# EAGLE board untitled (EAGLE 7.6.0)

Size 100 x 100 mm. Coordinates in mm from the lower left corner, seen from the top.
Outline: 0,0 100,0 100,100 0,100 0,0
Copper layers (1*16): Top 0.035mm / dielectric 1.5mm / Bottom 0.035mm
Design rules "default *": minimum track width 10mil, minimum drill 24mil, track to track 15mil, track to pad 15mil, pad to pad 15mil, via to via 10mil, smd to smd 10mil, copper to edge 40mil, drill to drill 8mil, minimum pad ring 10mil, minimum via ring 8mil, stop-mask expansion 4mil, vias tented up to drill 0mil, thermal gap 10mil

## Footprints (pad centres in the part's own frame; a part is rotated, then mirrored left to right if it is on the bottom)
ANT_315 = drill 1.016 pad 1.88: 1 -4.68,0.03
BUZZ_MODULE = drill 1.016 pad 1.88: 1 3.52,-1.97; 3 6.06,-1.97; 5 8.6,-1.97
E5-5 = drill 0.813 pad 1.905: + -2.54,0 | drill 0.813 pad 1.905 octagon: - 2.54,0
SO16 = smd 0.66 x 2.032: 1 -4.445,-3.073; 2 -3.175,-3.073; 3 -1.905,-3.073; 4 -0.635,-3.073; 5 0.635,-3.073; 6 1.905,-3.073; 7 3.175,-3.073; 8 4.445,-3.073; 9 4.445,3.073; 10 3.175,3.073; 11 1.905,3.073; 12 0.635,3.073; 13 -0.635,3.073; 14 -1.905,3.073; 15 -3.175,3.073; 16 -4.445,3.073
OUT_HEAD_4_AC_2CH = drill 1.6 pad 2.54: 1 -7.14,0.22; 2 -2.06,0.22; 3 3.02,0.22; 4 8.1,0.22
USB_V_OUT = drill 1.016 pad 1.88: 1 2.92,1.53; 4 10.04,1.53 | drill 1.016 pad 1.676: 2 5.46,1.53; 3 7.5,1.53 | drill 2 pad 2.184 long: P$1 -0.05,0.17; P$2 13.02,0.27
G5LE = drill 1.321 long: 1 -7.493,-5.969; 2 -7.493,5.969; O 4.699,5.969; P -9.525,0; S 4.699,-5.969
LIGHT_DEC = drill 1.016 pad 1.88: 1 -3.68,2.03; 2 -1.14,2.03; 3 1.4,2.03; 4 3.94,2.03
SELECT_3 = drill 1.016 pad 1.88: 1 -3.98,2.03; 2 -1.44,2.03; 3 1.1,2.03
ARDUINO_NANO = drill 1.016 pad 1.88: 1 -10.2,-8.1; 2 -7.66,-8.1; 3 -5.12,-8.1; 4 -2.58,-8.1; 5 -0.04,-8.1; 6 2.5,-8.1; 7 5.04,-8.1; 8 7.58,-8.1; 9 10.12,-8.1; 10 12.66,-8.1; 11 15.2,-8.1; 12 17.74,-8.1; 13 20.28,-8.1; 14 22.82,-8.1; 15 25.36,-8.1; 16 -10.2,6.93; 17 -7.66,6.93; 18 -5.12,6.93; 19 -2.58,6.93; 20 -0.04,6.93; 21 2.5,6.93; 22 5.04,6.93; 23 7.58,6.93; 24 10.12,6.93; 25 12.66,6.93; 26 15.2,6.93; 27 17.74,6.93; 28 20.28,6.93; 29 22.82,6.93; 30 25.36,6.93
NRF24L01 = drill 1.016 pad 1.88: 1 -13.21,1.73; 2 -13.21,4.27; 3 -10.67,1.73; 4 -10.67,4.27; 5 -8.13,1.73; 6 -8.13,4.27; 7 -5.59,1.73; 8 -5.59,4.27
IIC_OLED = drill 1.016 pad 1.88: 1 -3.68,2.03; 2 -1.14,2.03; 3 1.4,2.03; 4 3.94,2.03
315MHZ_RX_SMT = drill 1.016 pad 1.88: 1 -6.68,-6.86; 2 -4.14,-6.86; 3 -1.6,-6.86; 4 0.94,-6.86; 5 3.48,-6.86; 6 6.02,-6.86
IIC_TEMPERATURE = drill 1.016 pad 1.88: 1 -3.68,2.03; 2 -1.14,2.03; 3 1.4,2.03; 4 3.94,2.03
MOS_IRF520 = drill 1.016 pad 1.88: 1 -3.68,2.03; 2 -1.14,2.03; 3 1.4,2.03
ESP8266_MINI = drill 1.016 pad 1.88: 1 -10.61,1.53; 2 -8.07,1.53; 3 -5.53,1.53; 4 -2.99,1.53; 5 -0.45,1.53; 6 2.09,1.53; 7 4.63,1.53; 8 7.17,1.53; 9 -10.61,24.23; 10 -8.07,24.23; 11 -5.53,24.23; 12 -2.99,24.23; 13 -0.45,24.23; 14 2.09,24.23; 15 4.63,24.23; 16 7.17,24.23

## Placement (x,y rotation side)
ANT  [ANT_315]  101.3,74 0 top
BUZZ  [BUZZ_MODULE]  94.2,78 90 top
C1  [E5-5]  47.28,87.9 90 top
IC2  ULN2003AD  [SO16]  18.7,44.7 180 bottom
J  [OUT_HEAD_4_AC_2CH]  14,6 180 top
K1  [USB_V_OUT]  66.2,77.5 180 top
K2  G5L  [G5LE]  62.9,26.6 270 top
K3  G5L  [G5LE]  45.7,26.6 270 top
K4  G5L  [G5LE]  28.5,26.6 270 top
K5  G5L  [G5LE]  11.3,26.6 270 top
LIGHT  [LIGHT_DEC]  61.5,94.98 0 top
LOCAL  [SELECT_3]  87.22,94.92 0 top
NANO  [ARDUINO_NANO]  15.6,60.4 0 top
NRF  [NRF24L01]  92.9,34 270 top
OLED  [IIC_OLED]  74.24,94.96 0 top
RF_RX  [315MHZ_RX_SMT]  102.3,59.3 270 top
TEMPERATURE  [IIC_TEMPERATURE]  94.78,99 180 top
USB_CHARGE_MOS  [MOS_IRF520]  41.44,74.96 270 top
WIFI_CPU  [ESP8266_MINI]  19.6,72.7 0 top

## Library data of the parts
ANT BUZZ J K1 LIGHT LOCAL NANO NRF OLED RF_RX TEMPERATURE USB_CHARGE_MOS WIFI_CPU = rx
C1 = resistor
IC2 = uln-udn
K2-K5 = relay; OC_FARNELL: unknown; OC_NEWARK: unknown

## Nets
3V3: WIFI_CPU.9
+5V: BUZZ.5 C1.+ IC2.9 K1.1 K2.1 K3.1 K4.1 K5.1 LIGHT.4 NANO.12 OLED.2 RF_RX.3 TEMPERATURE.1 WIFI_CPU.1
A0: LIGHT.1 WIFI_CPU.15
ANT: ANT.1 RF_RX.1
D0: WIFI_CPU.14
D1: OLED.3 TEMPERATURE.4 WIFI_CPU.6
D2: OLED.4 TEMPERATURE.2 WIFI_CPU.5
D3: WIFI_CPU.4
D4: USB_CHARGE_MOS.1 WIFI_CPU.3
D5: LOCAL.1 WIFI_CPU.13
D6: LOCAL.3 RF_RX.4 WIFI_CPU.12
D7: WIFI_CPU.11
D8: BUZZ.3 WIFI_CPU.10
GND: BUZZ.1 C1.- IC2.8 LIGHT.3 LOCAL.2 NANO.14 NRF.1 OLED.1 RF_RX.2 TEMPERATURE.3 USB_CHARGE_MOS.3 WIFI_CPU.2
L: J.2
MOS_OUT: K1.4 USB_CHARGE_MOS.2
N: J.1
N$1: NRF.8
N$2: K1.2 K1.3
N$3: LIGHT.2
NAN0_GND2: NANO.27
NANO_3V3: NANO.2 NRF.2
NANO_A0: IC2.1 NANO.4
NANO_A1: IC2.2 NANO.5
NANO_A2: IC2.3 NANO.6
NANO_A3: IC2.4 NANO.7
NANO_A4: NANO.8
NANO_A5: NANO.9
NANO_A6: NANO.10
NANO_A7: NANO.11
NANO_AREF: NANO.3
NANO_D2: NANO.26
NANO_D3: NANO.25
NANO_D4: NANO.24
NANO_D5: NANO.23
NANO_D6: NANO.22
NANO_D7: NANO.21 NRF.3
NANO_D8: NANO.20 NRF.4
NANO_D9: NANO.19
NANO_D10: NANO.18
NANO_D11: NANO.17 NRF.6
NANO_D12: NANO.16 NRF.7
NANO_D13: NANO.1 NRF.5
NANO_RST: NANO.13
NANO_RST2: NANO.28
NANO_RX: NANO.29
NANO_TX: NANO.30
NANO_VIN: NANO.15
OUT1: J.3
OUT2: J.4
RST: WIFI_CPU.16
RX: WIFI_CPU.7
TX: WIFI_CPU.8
ULN_O1: IC2.16 K5.2
ULN_O2: IC2.15 K4.2
ULN_O3: IC2.14 K3.2
ULN_O4: IC2.13 K2.2

## Tracks (layer width: path | path; a pad name or v marks a point on that pad's centre or on a via)
+5V  (13 unrouted)
A0  (1 unrouted)
ANT  (1 unrouted)
D1  (2 unrouted)
D2  (2 unrouted)
D4  (1 unrouted)
D5  (1 unrouted)
D6  (2 unrouted)
D8  (1 unrouted)
GND  (11 unrouted)
MOS_OUT  (1 unrouted)
N$2  (1 unrouted)
NANO_3V3  (1 unrouted)
NANO_A0  (1 unrouted)
NANO_A1  (1 unrouted)
NANO_A2  (1 unrouted)
NANO_A3  (1 unrouted)
NANO_D7  (1 unrouted)
NANO_D8  (1 unrouted)
NANO_D11  (1 unrouted)
NANO_D12  (1 unrouted)
NANO_D13  (1 unrouted)
ULN_O1  (1 unrouted)
ULN_O2  (1 unrouted)
ULN_O3  (1 unrouted)
ULN_O4  (1 unrouted)